# EAGLE board HV Board (EAGLE 7.1.0)
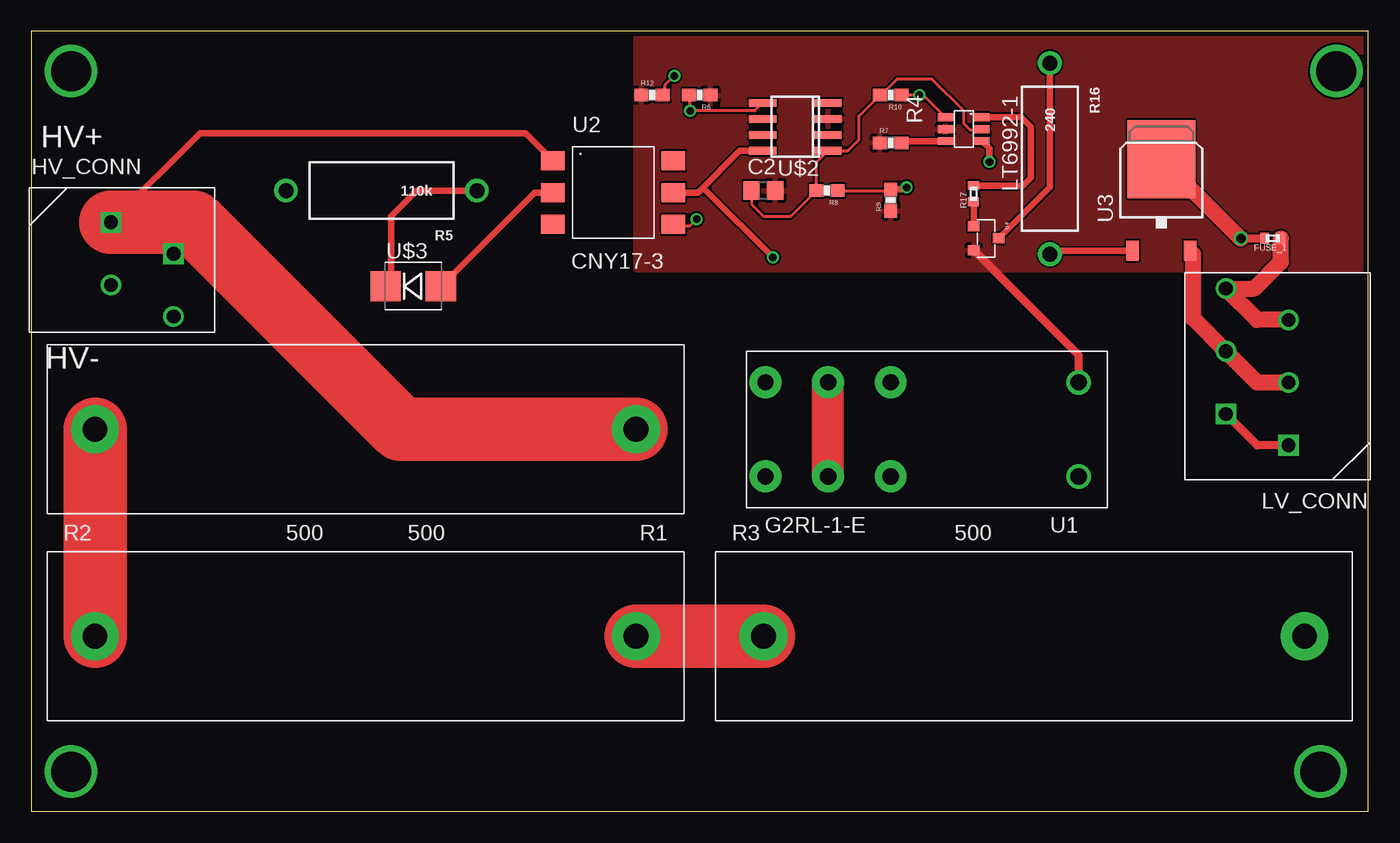
[diagram p0: board, top side]
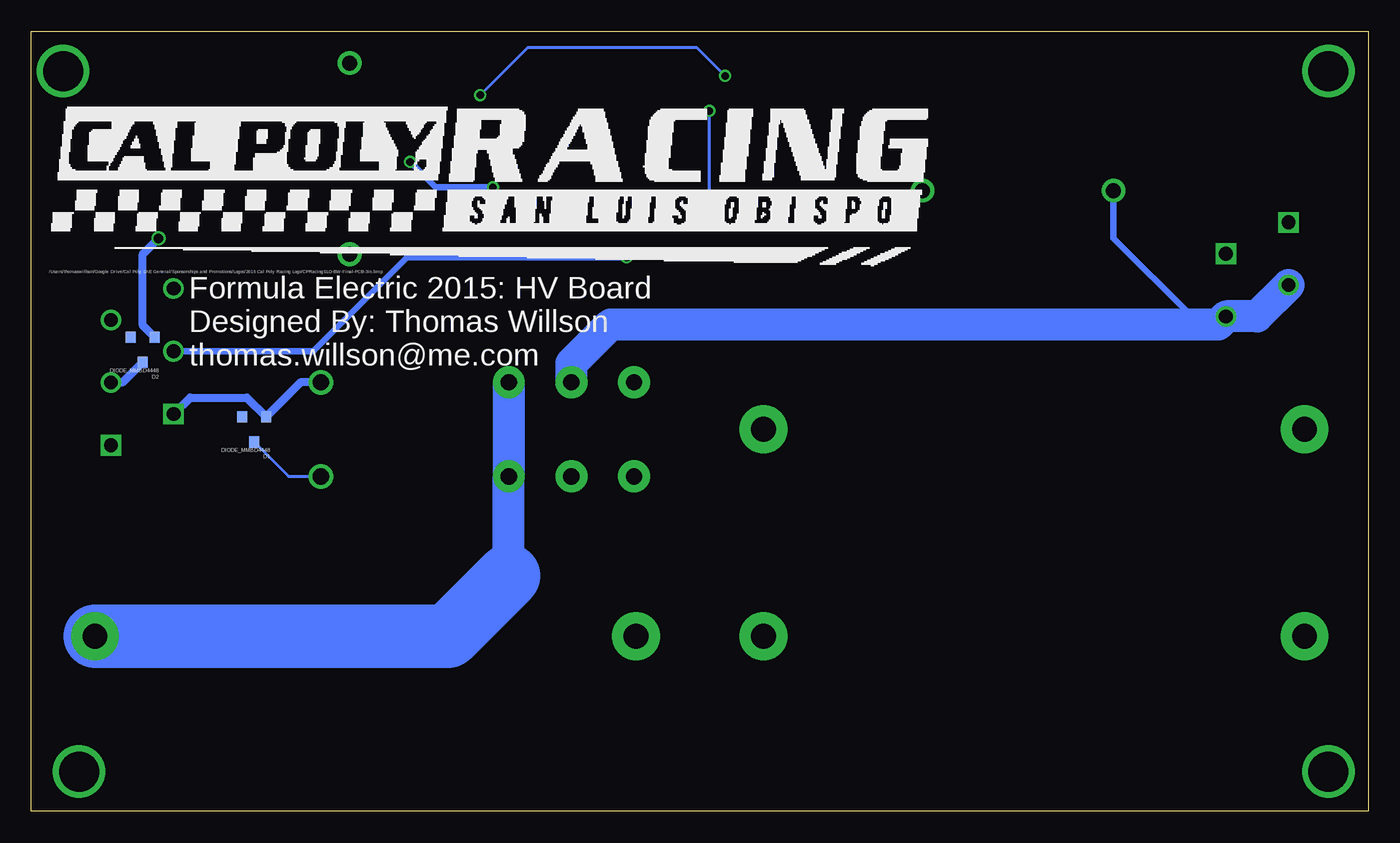
[diagram p1: board, bottom side, seen from below]

Size 106.68 x 62.23 mm. Coordinates in mm from the lower left corner, seen from the top.
Outline: 0,0 106.68,0 106.68,62.23 0,62.23 0,0
Copper layers (1*16): Top 0.0356mm / dielectric 1.5011mm / Bottom 0.0356mm
Design rules "LaenPCBOrder": minimum track width 6mil, minimum drill 13mil, track to track 6mil, track to pad 6mil, pad to pad 6mil, via to via 6mil, smd to smd 6mil, copper to edge 15mil, drill to drill 6mil, minimum pad ring 7mil, minimum via ring 7mil, stop-mask expansion 3mil, vias tented up to drill 0mil, thermal gap 10mil

## Footprints (pad centres in the part's own frame; a part is rotated, then mirrored left to right if it is on the bottom)
C0805 = smd 1.3 x 1.5: 1 -0.95,0; 2 0.95,0
SOT-23-3@1 = smd 0.8 x 0.9: P$1 0,1; P$2 -0.95,-1; P$3 0.95,-1
R0402 = smd 0.7 x 0.9: 1 -0.65,0; 2 0.65,0
CONNECTOR_2 = drill 1.1 square: 1 0,0; 2 2.5,5 | drill 1.1: 3 5,0; 4 7.5,5
CONNECTOR_3 = drill 1.1 square: 1 0,0; 2 2.5,5 | drill 1.1: 3 5,0; 4 7.5,5; 5 10,0; 6 12.5,5
VISHAY_FS20W_RES = drill 1.981 pad 3.81: P$1 -21.59,0; P$2 21.59,0
LTC6992-1 = smd 0.62 x 1.22: P$1 0.5,-0.7; P$2 1.45,-0.7; P$3 2.4,-0.7; P$4 2.4,2.2; P$5 1.45,2.2; P$6 0.5,2.2
AXIAL-0.6 = drill 1.2 pad 1.88: P$1 -7.62,0; P$2 7.62,0
0603-RES = smd 1.1 x 1: 1 -0.85,0; 2 0.85,0
G2RL-1-E_RELAY = drill 1.3: P$1 -15,-3.75; P$8 -15,3.75 | drill 1.3 pad 2.54: P$2 0,-3.75; P$3 5,-3.75; P$4 10,-3.75; P$5 10,3.75; P$6 5,3.75; P$7 0,3.75
CNY17-3 = smd 1.88 x 1.52: P$1 -1.55,3.65; P$2 -1.55,6.19; P$3 -1.55,1.11; P$4 8.05,1.11; P$5 8.05,3.65; P$6 8.05,6.19
D-PAK_TO252AA = smd 1 x 1.6: 1 -2.28,-4.8; 3 2.28,-4.8 | smd 5.4 x 6.2: 4 0,2.5
SOT-23-3 = smd 0.8 x 0.9: P$1 0,1; P$2 -0.95,-1; P$3 0.95,-1
SOIC8 = smd 0.6 x 2.2: 1 -1.905,-2.6; 2 -0.635,-2.6; 3 0.635,-2.6; 4 1.905,-2.6; 5 1.905,2.6; 6 0.635,2.6; 7 -0.635,2.6; 8 -1.905,2.6
SMB-DIODE = smd 2.4 x 2.4: A 2.2,0; C -2.2,0

## Placement (x,y rotation side)
C2  1µF  [C0805]  58.42,49.53 0 top
D1  DIODE_MMBD4448  [SOT-23-3@1]  88.9,30.48 180 bottom
D2  DIODE_MMBD4448  [SOT-23-3@1]  97.79,36.83 180 bottom
FUSE_1  [R0402]  99.06,45.72 180 top
HV_CONN  CONN_2  [CONNECTOR_2]  6.35,46.99 270 top
LV_CONN  CONN_3  [CONNECTOR_3]  100.33,29.21 90 top
R1  500  [VISHAY_FS20W_RES]  26.67,30.48 180 top
R2  500  [VISHAY_FS20W_RES]  26.67,13.97 0 top
R3  500  [VISHAY_FS20W_RES]  80.01,13.97 0 top
R4  LTC6992-1  [LTC6992-1]  73.66,55.88 270 top
R5  110k  [AXIAL-0.6]  27.94,49.53 180 top
R6  22k  [0603-RES]  53.34,57.15 180 top
R7  1100k  [0603-RES]  68.58,53.34 0 top
R8  1M  [0603-RES]  63.5,49.53 180 top
R9  887k  [0603-RES]  68.58,48.77 90 top
R10  100k  [0603-RES]  68.58,57.15 180 top
R12  10k  [0603-RES]  49.53,57.15 0 top
R16  240  [AXIAL-0.6]  81.28,52.07 270 top
R17  3.9k  [R0402]  75.18,49.28 90 top
U1  G2RL-1-E  [G2RL-1-E_RELAY]  68.58,30.48 180 top
U2  CNY17-3  [CNY17-3]  43.18,45.72 0 top
U3  MJD45H11T4G  [D-PAK_TO252AA]  90.17,49.53 0 top
U4  MMBT4401-7-F  [SOT-23-3]  76.2,45.72 270 top
U$2  LT1121  [SOIC8]  60.96,54.61 90 top
U$3  SMBJ5371B-TP  [SMB-DIODE]  30.48,41.91 0 top

## Library data of the parts
C2 = sym
D1 D2 HV_CONN LV_CONN R1-R3 U4 = formula electric
FUSE_1 R17 = resistor
R4 U2 = FE_Kenny
R5-R10 R12 R16 = SparkFun-Resistors
U1 = formula electric; COIL: DC 12
U3 = on-semiconductor
U$2 = linear-technology
U$3 = micro-commercial

## Nets
5V: C2.1 R4.P$5 R8.2 R10.2 U$2.1
GLV+: D2.P$1 LV_CONN.3 LV_CONN.4 U2.P$5 U3.3 U$2.8
GND: C2.2 D1.P$2 LV_CONN.1 LV_CONN.2 R4.P$2 R6.1 R7.1 R9.1 R12.1 U1.P$1 U4.P$3 U$2.3
HV+: HV_CONN.3 HV_CONN.4 R5.P$2 U1.P$3 U1.P$6
HV-: HV_CONN.1 HV_CONN.2 R1.P$1 U2.P$2
N$1: R5.P$1 U$3.C
N$3: R3.P$2 U1.P$2 U1.P$7
N$10: R1.P$2 R2.P$1
N$11: R2.P$2 R3.P$1
N$14: R4.P$1 R10.1 R12.2
N$15: U2.P$1 U$3.A
N$17: R16.P$2 U3.1
N$18: R4.P$3 R7.2
N$19: R4.P$4 R8.1 R9.2
N$20: R16.P$1 U4.P$1
N$21: R17.1 U4.P$2
N$22: R4.P$6 R17.2
N$26: R6.2 U2.P$4 U$2.5
N$29: D2.P$2 FUSE_1.2 U3.4
TSAL+: FUSE_1.1 LV_CONN.5 LV_CONN.6
TSMS_IN: D1.P$1 U1.P$8

## Tracks (layer width: path | path; a pad name or v marks a point on that pad's centre or on a via)
5V
  Top 0.254: R4.P$5 75.79,54.36 74.93,54.36 74.42,54.86 74.42,55.88 71.88,58.42 69.09,58.42 67.82,57.15 R10.2 66.04,55.46 66.04,53.59 65.15,52.7 U$2.1 62.65,51.8 R8.2 60.62,47.5 58.42,47.5 57.47,48.45 C2.1
GLV+  (via drill 0.6)
  Top 0.254: 53.34,49.53 53.85,49.53
  Top 0.508: U2.P$5 53.18,49.37 53.34,49.53 56.52,52.7 U$2.8 | 53.85,49.53 v59.18,44.2
  Top 0.635: 92.71,44.47 U3.3
  Top 1.27: LV_CONN.3 97.83,34.21 LV_CONN.4 92.71,39.33 92.71,44.47
  Bottom 0.508: v59.18,44.2 76.71,44.2 84.19,36.71 LV_CONN.4
  Bottom 0.635: D2.P$1 99.41,34.21 LV_CONN.3
GND
  Top 0.635: LV_CONN.1 97.83,29.21 LV_CONN.2 | U1.P$1 83.58,36.39 U4.P$3
  Bottom 0.635: LV_CONN.2 94.02,33.02 89.49,33.02 D1.P$2 85.2,34.23 U1.P$1
  pour Top: 48.26,62.23 106.68,62.23 106.68,43.18 48.26,43.18
HV+
  Top 2.54: U1.P$6 U1.P$3
  Bottom 0.508: HV_CONN.4 14.09,39.49 20.32,45.72 R5.P$2
  Bottom 2.54: HV_CONN.3 8.85,39.49 HV_CONN.4 11.98,38.86 60.45,38.86 63.58,35.73 U1.P$3
HV-
  Top 0.508: HV_CONN.2 8.85,46.99 HV_CONN.1 13.46,54.1 39.44,54.1 U2.P$2
  Top 5.08: R1.P$1 29.46,30.48 12.95,46.99 HV_CONN.1
N$1
  Top 0.508: U$3.C 28.7,42.33 28.7,47.5 30.73,49.53 R5.P$1 36.07,49.53
N$3
  Bottom 2.54: 68.58,18.8 U1.P$7 U1.P$2
  Bottom 5.08: R3.P$2 73.41,13.97 68.58,18.8
N$4  (via drill 3.17)
  other vias: 3.18,59.05
N$5  (via drill 3.17)
  other vias: 3.17,3.17
N$10
  Top 5.08: R1.P$2 R2.P$1
N$11
  Top 5.08: R2.P$2 R3.P$1
N$12  (via drill 3.17)
  other vias: 102.87,3.17
N$13  (via drill 3.17)
  other vias: 104.14,59.05
N$14  (via drill 0.6)
  Top 0.254: R4.P$1 71.19,57.15 v70.87,57.15 R10.1 | v51.31,58.67 50.55,57.91 50.55,57.15 R12.2
  Bottom 0.254: v51.31,58.67 53.59,60.96 67.06,60.96 v70.87,57.15
N$15
  Top 0.508: U$3.A 40.14,49.37 U2.P$1
N$17
  Top 0.508: R16.P$2 81.56,44.73 U3.1
N$18
  Top 0.508: R7.2 69.57,53.48 R4.P$3
N$19  (via drill 0.6)
  Top 0.254: R8.1 68.49,49.53 R9.2
  Top 0.508: R4.P$4 76.45,52.89 v76.45,51.82 | v69.85,49.78 69.85,49.62 R9.2
  Bottom 0.508: v76.45,51.82 74.42,49.78 v69.85,49.78
N$20
  Top 0.508: R16.P$1 81.28,49.8 U4.P$1
N$21
  Top 0.508: R17.1 75.2,48.61 U4.P$2
N$22
  Top 0.508: R17.2 79.14,49.93 79.76,50.55 79.76,54.61 78.99,55.37 R4.P$6
N$26  (via drill 0.6)
  Top 0.254: v53.09,47.24 52.58,46.74 51.31,46.74 U2.P$4 | R6.2 52.58,57.15 v52.58,55.88 57.73,55.88 U$2.5
  Bottom 0.254: v52.58,55.88 52.58,47.75 v53.09,47.24
N$29  (via drill 0.76)
  Top 0.635: v96.52,45.72 FUSE_1.2
  Top 1.27: v96.52,45.72 96.48,45.72 U3.4
  Bottom 0.635: D2.P$2 97.79,38.78 97.79,44.45 v96.52,45.72
TSAL+
  Top 1.27: LV_CONN.5 97.83,39.21 LV_CONN.6 97.59,41.71 99.71,43.83 FUSE_1.1
TSMS_IN
  Bottom 0.254: D1.P$1 86.15,26.73 U1.P$8

## Text on the board
tPlace: HV+ | HV-
bPlace: /Users/thomaswillson/Google Drive/Cal Poly SAE General/Sponsorships and Promotions/Logos/2015 Cal Poly Racing Logo/CPRacingSLO-BW-Final-PCB-3in.bmp
bNames: Formula Electric 2015: HV Board / Designed By: Thomas Willson / thomas.willson@me.com